# EAGLE board Blow out LED tree - test circuit v3 (EAGLE 9.7.0)
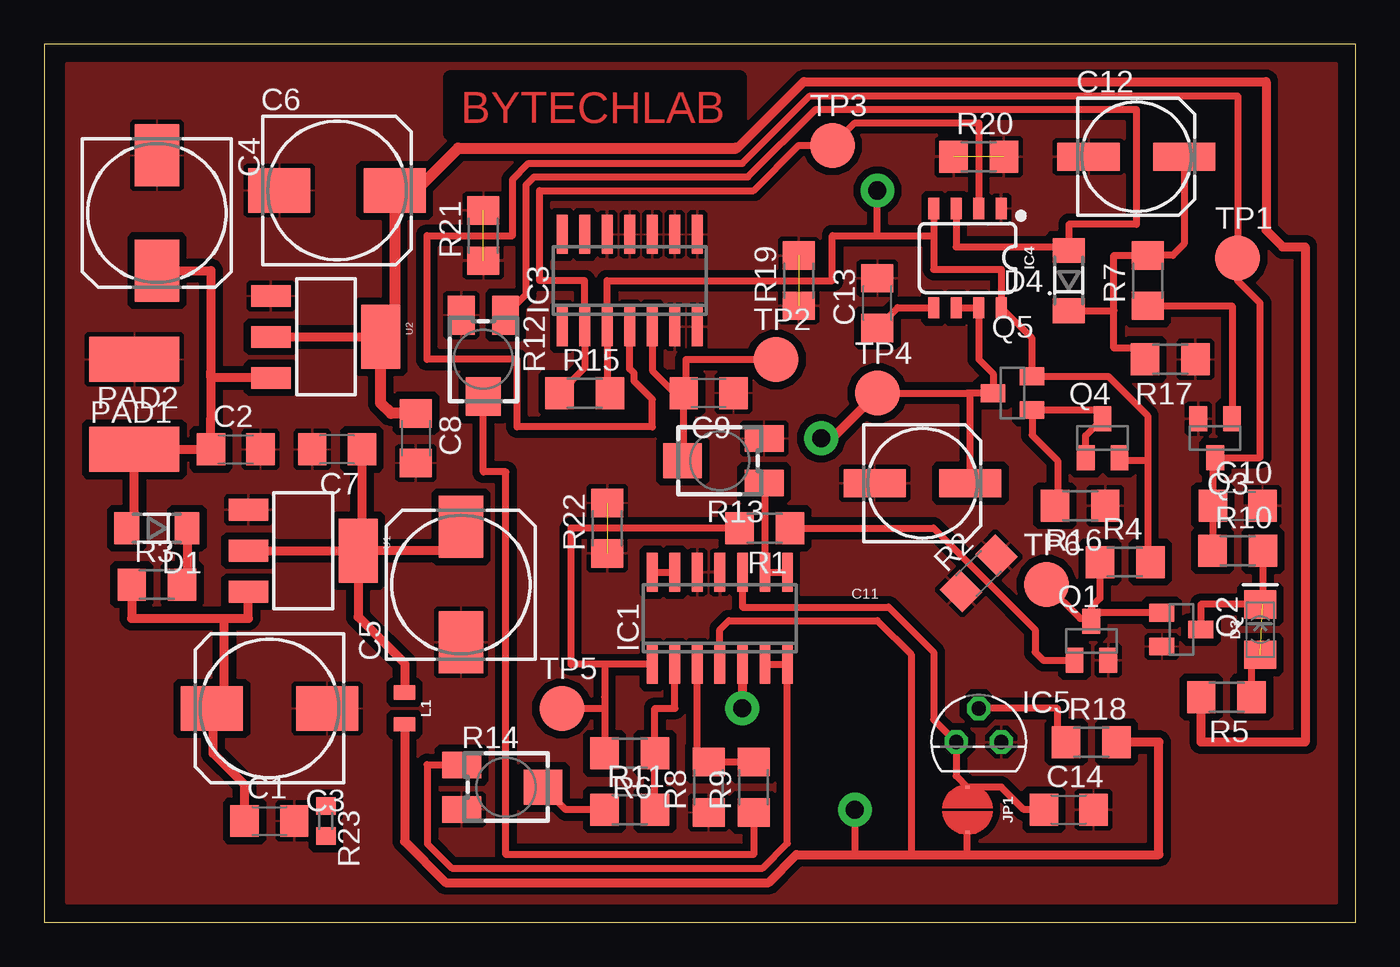
[diagram p0: board, top side]
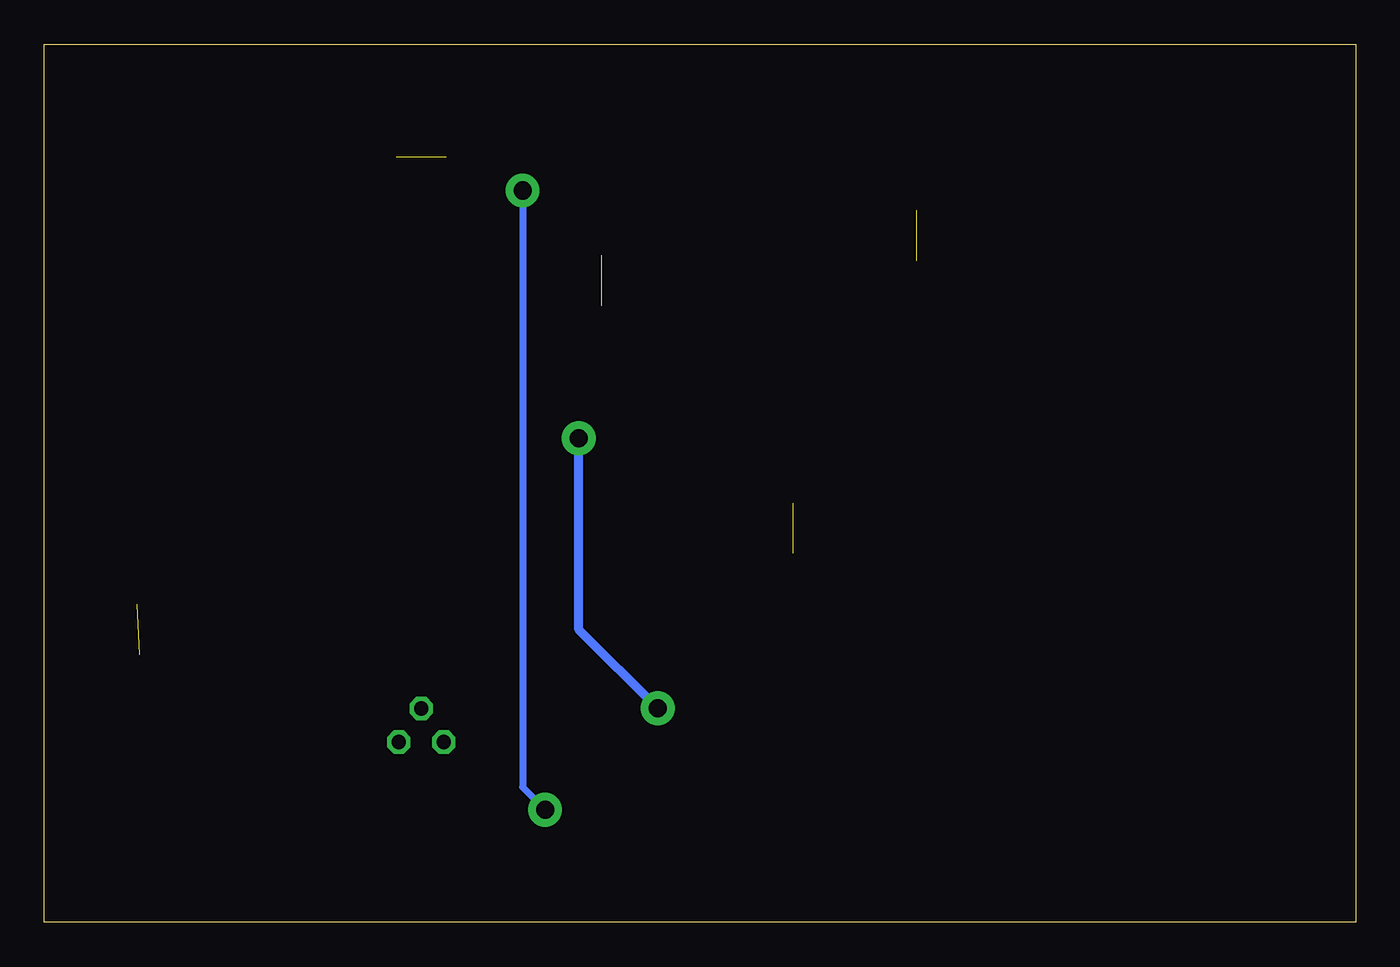
[diagram p1: board, bottom side, seen from below]

Size 73.97 x 49.52 mm. Coordinates in mm from the lower left corner, seen from the top.
Outline: 0,0 73.97,0 73.97,49.52 0,49.52 0,0
Copper layers (1*16): Top / Bottom
Stack-up Default Layer Stack: Top User Defined 0.035mm / Dielectric-1 User Defined 1.5mm / Bottom User Defined 0.035mm
Design rules: minimum copper width 6mil, minimum drill size 0.35mm, copper clearance wire_polygon to wire_polygon 14mil, copper clearance wire_polygon to pad_smd 14mil, copper clearance wire_polygon to via 14mil, copper clearance pad_smd to pad_smd 14mil, copper clearance pad_smd to via 14mil, copper clearance via to via 14mil, copper clearance smd to pad (same net) 14mil, copper clearance smd to via (same net) 14mil, copper clearance smd to smd (same net) 14mil, dimension clearance 40mil, via restrict clearance 0mil, restrict clearance 0mil, drill distance 6mil, keepout clearance 0mil

## Footprints (pad centres in the part's own frame; a part is rotated, then mirrored left to right if it is on the bottom)
C1206 = smd 1.6 x 1.8: 1 -1.4,0; 2 1.4,0
153CLV-0810 = smd 3.5 x 2.5: + 3.25,0; - -3.25,0
153CLV-0605 = smd 3.5 x 1.6: + 2.7,0; - -2.7,0
SOD80_DO213AA_MINIMELF = smd 1.4 x 1.8: A 1.7,0; C -1.7,0
FKIT-LED-1206 = smd 1.6 x 1.803: A -1.422,0; C 1.422,0
SO14 = smd 0.6 x 2.2: 1 -3.81,-2.6; 2 -2.54,-2.6; 3 -1.27,-2.6; 4 0,-2.6; 5 1.27,-2.6; 6 2.54,-2.6; 7 3.81,-2.6; 8 3.81,2.6; 9 2.54,2.6; 10 1.27,2.6; 11 0,2.6; 12 -1.27,2.6; 13 -2.54,2.6; 14 -3.81,2.6
SO08 = smd 0.6 x 1.2: 1 -1.905,-2.8; 2 -0.635,-2.8; 3 0.635,-2.8; 4 1.905,-2.8; 5 1.905,2.8; 6 0.635,2.8; 7 -0.635,2.8; 8 -1.905,2.8
TO92 = drill 0.813 octagon: 1 -1.27,0; 2 0,1.905; 3 1.27,0
SMT-JUMPER_2_NO_NO-SILK_ROUND = smd 0.152 x 0.305: 1 -1.27,0; 2 1.27,0
0805 = smd 0.8 x 1.2: 1 -0.9,0; 2 0.9,0
SMD2,54-5,08 = smd 2.54 x 5.08: 1 0,0
SOT23 = smd 1 x 1.4: 1 -0.95,-1.1; 2 0.95,-1.1; 3 0,1.1
SOT23-BEC = smd 1 x 1.4: B -0.95,-1.1; C 0,1.1; E 0.95,-1.1
R1206 = smd 1.6 x 1.803: 1 -1.422,0; 2 1.422,0
RTRIM3374 = smd 1.5 x 2.2: 1 -1.25,-2.5; 3 1.25,-2.5 | smd 1.98 x 2.17: 2 0,2.1
R0603 = smd 1 x 1.1: 1 -0.85,0; 2 0.85,0
B2,54 = smd 2.54 x 2.54: TP 0,0
SOT223 = smd 1.219 x 2.235: 1 -2.311,-3.099; 2 0,-3.099; 3 2.311,-3.099 | smd 3.6 x 2.2: 4 0,3.099

## Placement (x,y rotation side)
C1  100n  [C1206]  12.7,5.71 0 top
C2  100n  [C1206]  10.79,26.67 0 top
C3  [153CLV-0810]  12.7,12.07 180 top
C4  [153CLV-0810]  6.35,40 270 top
C5  [153CLV-0810]  23.5,19.05 90 top
C6  [153CLV-0810]  16.51,41.27 0 top
C7  100n  [C1206]  16.51,26.67 180 top
C8  100n  [C1206]  20.96,27.3 270 top
C9  100n  [C1206]  37.47,29.85 180 top
C10  100n  [C1206]  67.31,23.5 0 top
C11  47u  [153CLV-0605]  49.53,24.76 0 top
C12  1u  [153CLV-0605]  61.59,43.18 0 top
C13  10n  [C1206]  46.99,34.92 90 top
C14  100n  [C1206]  57.79,6.35 0 top
D1  LL4148  [SOD80_DO213AA_MINIMELF]  6.35,22.22 180 top
D3  GREEN  [FKIT-LED-1206]  68.58,16.51 90 top
D4  1N4148  [SOD80_DO213AA_MINIMELF]  57.79,36.19 90 top
IC1  LM324D  [SO14]  38.1,17.14 0 top
IC3  LM339D  [SO14]  33.02,36.19 0 top
IC4  555  [SO08]  52.07,37.47 180 top
IC5  LM336LP  [TO92]  52.7,10.16 0 top
JP1  JUMPER  [SMT-JUMPER_2_NO_NO-SILK_ROUND]  52.07,6.35 270 top
L1  3.3µH  [0805]  20.32,12.07 270 top
PAD1  WIREPADSMD2,54-5,08  [SMD2,54-5,08]  5.08,26.67 270 top
PAD2  WIREPADSMD2,54-5,08  [SMD2,54-5,08]  5.08,31.75 90 top
Q1  BC847  [SOT23]  59.06,15.87 0 top
Q2  MOS-N  [SOT23]  64.14,16.51 270 top
Q3  BC847  [SOT23]  66.04,27.3 180 top
Q4  BC857  [SOT23-BEC]  59.69,27.3 0 top
Q5  BC857  [SOT23-BEC]  54.61,29.85 90 top
R1  ~260  [R1206]  40.64,22.22 180 top
R2  zw  [R1206]  52.7,19.68 45 top
R3  POLY_FUSE  [R1206]  6.35,19.05 0 top
R4  1k  [R1206]  60.96,20.32 0 top
R5  82  [R1206]  66.68,12.7 180 top
R6  10k  [R1206]  33.02,9.53 180 top
R7  ~260  [R1206]  62.23,36.19 90 top
R8  10k  [R1206]  37.47,7.62 90 top
R9  10k  [R1206]  40.01,7.62 90 top
R10  100k  [R1206]  67.31,20.96 0 top
R11  10k  [R1206]  33.02,6.35 0 top
R12  10k  [RTRIM3374]  24.77,31.75 180 top
R13  10k  [RTRIM3374]  38.1,26.04 90 top
R14  10k  [RTRIM3374]  26.04,7.62 270 top
R15  10k  [R1206]  30.48,29.85 0 top
R16  100k  [R1206]  58.42,23.5 180 top
R17  10M  [R1206]  63.5,31.75 180 top
R18  2.49k  [R1206]  59.06,10.16 0 top
R19  zw  [R1206]  42.55,36.19 90 top
R20  zw  [R1206]  52.7,43.18 0 top
R21  zw  [R1206]  24.77,38.73 90 top
R22  zw  [R1206]  31.75,22.22 90 top
R23  [R0603]  15.88,5.71 270 top
TP1  PTR1B2,54  [B2,54]  67.31,37.47 0 top
TP2  PTR1B2,54  [B2,54]  41.28,31.75 0 top
TP3  PTR1B2,54  [B2,54]  44.45,43.81 0 top
TP4  PTR1B2,54  [B2,54]  46.99,29.85 0 top
TP5  PTR1B2,54  [B2,54]  29.21,12.07 0 top
TP6  PTR1B2,54  [B2,54]  56.52,19.05 0 top
U1  [SOT223]  14.61,20.96 270 top
U2  [SOT223]  15.88,33.02 270 top

## Library data of the parts
C1-C14 = rcl; SPICEPREFIX: C
D1 D4 = _hhn_diodes_smd
D3 = SparkFun-LED
IC1 IC5 = linear
IC3 = linear3
IC4 = SparkFun-IC-Special-Function; PROD_ID: NA-XXXXX
JP1 = SparkFun-Jumpers
L1 = SparkFun-Coils; PROD_ID: NDUC-13076
PAD1 PAD2 = wirepad
Q1 Q3 = transistor-npn
Q2 = transistor-small-signal
Q4 Q5 = transistor-pnp
R1-R11 R15-R23 = rcl; SPICEPREFIX: R
R12-R14 = rcl; SPICEMODEL: X; SPICEPREFIXL: POT
TP1-TP6 = testpad
U1 U2 = SparkFun-IC-Power; PROD_ID: VREG-08170

## Nets
+5V: IC1.4 IC3.3 IC4.4 IC4.8 JP1.2 L1.2 Q4.E Q5.E R4.2 R15.2 R18.2
+12V: C2.1 C4.+ D1.A PAD1.1 U2.3
GND: C1.2 C2.2 C3.- C4.- C5.- C6.- C7.2 C8.2 C9.1 C10.2 C11.- C12.- C13.2 C14.2 IC1.11 IC1.12 IC3.6 IC3.7 IC3.8 IC3.9 IC3.10 IC3.11 IC3.12 IC4.1 IC5.3 PAD2.1 Q1.2 Q2.2 Q3.2 R2.1 R2.2 R8.1 R12.3 R13.3 R14.3 R16.1 R17.1 R19.1 R19.2 R20.1 R20.2 R21.1 R21.2 R22.1 R22.2 U1.1 U2.1
N$1: D3.A R5.1 R10.2
N$3: C14.1 IC1.10 IC5.1 JP1.1
N$4: C10.1 IC3.4 Q3.3 R10.1 TP1.TP
N$5: C9.2 IC3.5 R13.2 TP2.TP
N$6: Q3.1 R7.1
N$7: Q4.B Q4.C Q5.B R16.2
N$8: IC1.6 IC1.7 R14.1
N$9: IC3.2 IC4.2 R15.1 TP3.TP
N$10: C13.1 IC4.5
N$11: D4.A IC4.3 R12.1
N$12: C12.+ D4.C R7.2 R17.2
N$13: IC1.3 R8.2 R9.2
N$14: C11.+ IC1.5 IC4.6 IC4.7 Q5.C TP4.TP
N$15: IC1.2 R6.1 R11.2
N$16: IC1.1 R1.2 R6.2 TP5.TP
N$17: R11.1 R14.2
N$18: R9.1 R12.2
N$19: IC5.2 R18.1
N$20: Q1.3 Q2.1 R4.1 TP6.TP
N$21: Q1.1 R1.1
N$22: IC1.13 IC1.14
N$23: D1.C R3.2
N$24: C1.1 C3.+ R3.1 U1.3
N$25: C5.+ C7.1 L1.1 U1.2 U1.4
N$26: D3.C Q2.3
REF_V: IC1.8 IC1.9 R13.1
V+: C6.+ C8.1 R5.2 U2.2 U2.4

## Tracks (layer width: path | path; a pad name or v marks a point on that pad's centre or on a via)
+5V  (via drill 1.02 pad 1.91)
  Top 0.406: IC4.4 50.17,38.73 | 50.17,38.73 50.17,36.83 53.98,36.83 IC4.8 55.71,32.93 Q5.E 60.01,30.79 62.23,28.57 62.23,26.04 | 62.23,26.04 60.81,26.04 Q4.E | R15.2 31.75,30 IC3.3 31.75,36.19 44.45,36.19 44.45,38.73 46.99,38.73 | 46.99,38.73 50.17,38.73 | 62.23,26.04 62.23,20.47 R4.2 | IC1.4 38.1,16.51 38.61,17.02 46.99,17.02 48.9,15.11 48.9,3.81 | 52.07,3.81 JP1.2 | 46.99,38.73 v46.99,41.27 | v45.72,6.35 45.72,3.81
  Top 0.508: L1.2 20.32,4.57 22.65,2.23 40.85,2.23 42.42,3.81 45.72,3.81 48.9,3.81 52.07,3.81 62.87,3.81 62.87,10.16 R18.2
  Bottom 0.406: v46.99,41.27 46.99,7.62 v45.72,6.35
+12V
  Top 0.508: C4.+ 9.39,36.75 9.39,31.11 | 9.39,31.11 9.39,28.44 C2.1 PAD1.1 5.08,22.22 D1.A | U2.3 9.39,30.71 9.39,31.11
GND  (4 unrouted)
  pour Top (isolate 0.406): 73.1,48.97 1.19,48.97 1.19,0.56 73.1,0.56
N$1  (1 unrouted)
  Top 0.406: R5.1 68.1,15.09 D3.A | R10.2 68.73,17.93
N$3
  Top 0.406: IC1.10 39.37,17.78 47.62,17.78 50.17,15.24 50.17,11.43 IC5.1 51.44,8.25 JP1.1 53.98,7.62 55.25,6.35 C14.1
N$4
  Top 0.406: R10.1 65.91,20.96 C10.1 65.91,26.21 Q3.3 68.58,26.21 68.58,34.92 67.31,36.19 TP1.TP 67.31,46.61 43.18,46.61 39.37,42.8 27.31,42.8 26.42,41.91 26.42,38.73 21.59,38.73 21.59,31.75 26.67,31.75 26.67,27.94 34.29,27.94 34.29,29.49 33.26,30.52 33.26,30.98 33.02,31.22 IC3.4
N$5
  Top 0.406: IC3.5 34.29,31.11 35.56,29.85 C9.2 | R13.2 36.06,26.1 C9.2 | C9.2 36.2,29.97 36.2,31.75 TP2.TP
N$6
  Top 0.406: R7.1 66.99,34.77 Q3.1
N$7
  Top 0.406: Q4.B 58.74,27.46 Q4.C arc90 59.2,28.89 Q5.B 55.71,27.47 57.15,26.04 57.15,23.65 R16.2
N$8
  Top 0.406: IC1.6 IC1.7 41.91,4.45 40.51,3.05 22.99,3.05 21.61,4.43 21.61,8.87 | R14.1 21.61,8.87 | 21.61,8.87 21.59,8.89
N$9
  Top 0.406: IC4.2 52.7,45.08 45.72,45.08 TP3.TP 42.55,43.81 40.01,41.27 27.94,41.27 27.94,36.19 30.48,36.19 IC3.2 30.48,31.27 R15.1
N$10
  Top 0.406: C13.1 48.13,34.66 IC4.5
N$11
  Top 0.406: IC4.3 51.44,38.1 55.88,38.1 57.58,38.1 D4.A 57.79,39.37 61.59,39.37 61.59,45.85 43.5,45.85 39.69,42.04 27.62,42.04 27.18,41.59 27.18,35.41 R12.1
N$12
  Top 0.406: D4.C 60.33,34.5 | 60.33,34.5 60.33,37.62 R7.2 63.65,37.62 64.3,38.26 C12.+ | R17.2 62.08,32.39 60.33,32.39 60.33,34.5
N$13
  Top 0.406: R9.2 R8.2 36.83,9.04 IC1.3
N$14  (via drill 1.02 pad 1.91)
  Top 0.406: IC4.6 IC4.7 52.7,31.75 53.51,30.94 Q5.C 52.07,29.85 | TP4.TP 52.07,29.85 | C11.+ 52.23,29.85 52.07,29.85
  Top 0.508: IC1.5 v39.37,12.07 | v43.81,27.3 44.45,27.3 TP4.TP
  Bottom 0.508: v39.37,12.07 43.81,16.51 v43.81,27.3
N$15
  Top 0.406: IC1.2 35.56,12.07 34.44,12.07 R6.1 R11.2
N$16
  Top 0.406: IC1.1 31.6,14.54 | 31.6,14.54 31.6,12.7 31.6,12.07 | TP5.TP 31.6,12.07 | R1.2 29.69,22.22 29.69,14.54 31.6,14.54 | 31.6,12.07 R6.2
N$17
  Top 0.406: R11.1 29.4,6.35 R14.2
N$18
  Top 0.406: R9.1 40.01,3.81 26.04,3.81 26.04,25.4 24.77,25.4 R12.2
N$19
  Top 0.406: R18.1 57.15,10.64 57.15,12.07 IC5.2
N$20
  Top 0.406: R4.1 59.54,18.26 59.06,17.78 59.06,17.14 | 59.06,17.14 Q1.3 59.54,17.46 Q2.1 | TP6.TP 58.42,17.14 59.06,17.14
N$21
  Top 0.406: R1.1 50.17,22.22 55.88,16.51 55.88,15.24 56.34,14.78 Q1.1
N$22
  Top 0.406: IC1.14 IC1.13
N$23
  Top 0.508: D1.C 8.05,19.05 R3.2
N$24
  Top 0.508: R3.1 4.93,17.14 10.16,17.14 | U1.3 11.51,17.14 10.16,17.14 | C3.+ 9.81,12.42 | 9.81,12.42 10.16,12.78 10.16,17.14 | C1.1 11.3,7.75 9.53,9.53 9.53,12.14 9.81,12.42
N$25
  Top 0.508: C7.1 17.91,20.96 | 17.91,20.96 U1.4 17.7,17.22 20.32,14.61 L1.1 | C5.+ 23.5,20.96 17.91,20.96 | U1.2 17.91,20.96
N$26
  Top 0.406: D3.C 65.23,17.93 Q2.3
REF_V
  Top 0.406: R13.1 40.64,24.75 IC1.9 IC1.8
V+
  Top 0.508: 20.57,41.27 C6.+ | 39.02,43.66 39.09,43.66 42.85,47.42 68.92,47.42 68.92,39.03 69.85,38.1 71.12,38.1 71.12,10.16 65.25,10.16 R5.2 | U2.2 U2.4
  Top 0.61: C8.1 19.56,28.71 18.97,29.29 U2.4 19.76,33.81 C6.+ 20.96,41.27 23.34,43.66 39.02,43.66

## Text on the board
Top: BYTECHLAB